# Altium PCB TK511_Blindkort.PcbDoc
Units mm, origin at the board's own origin, x right, y up, seen from the top; angles counter-clockwise.
Board outline 77.5 x 82.75 mm, 4 copper layers (TopLayer, InternalPlane1, InternalPlane2, BottomLayer); 7 components, 32 nets, 387 pads, 0 vias.
Unrouted connection lines stored in the file: 3.
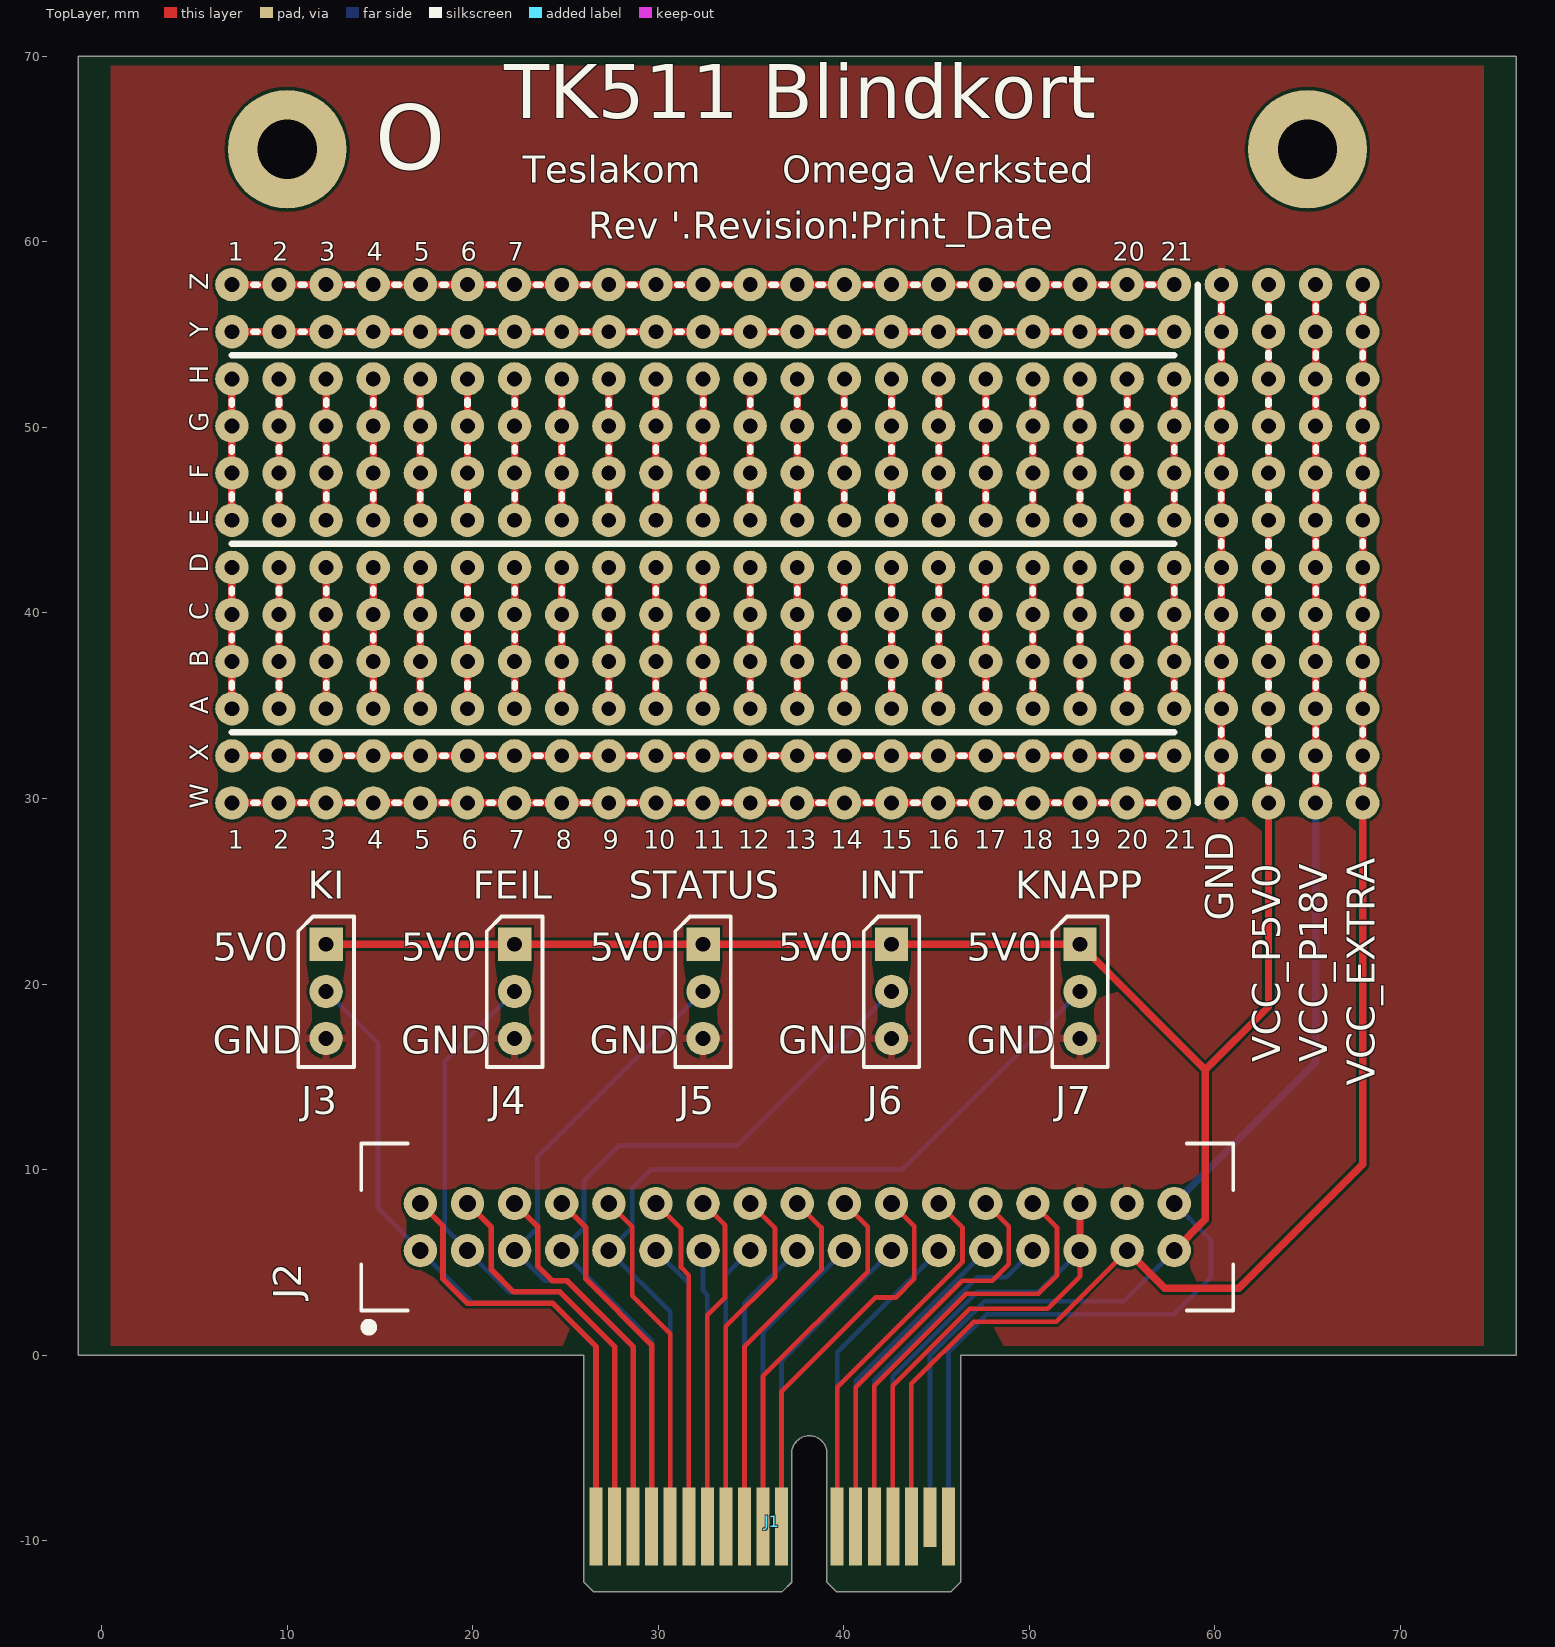
[diagram p0: TopLayer view]
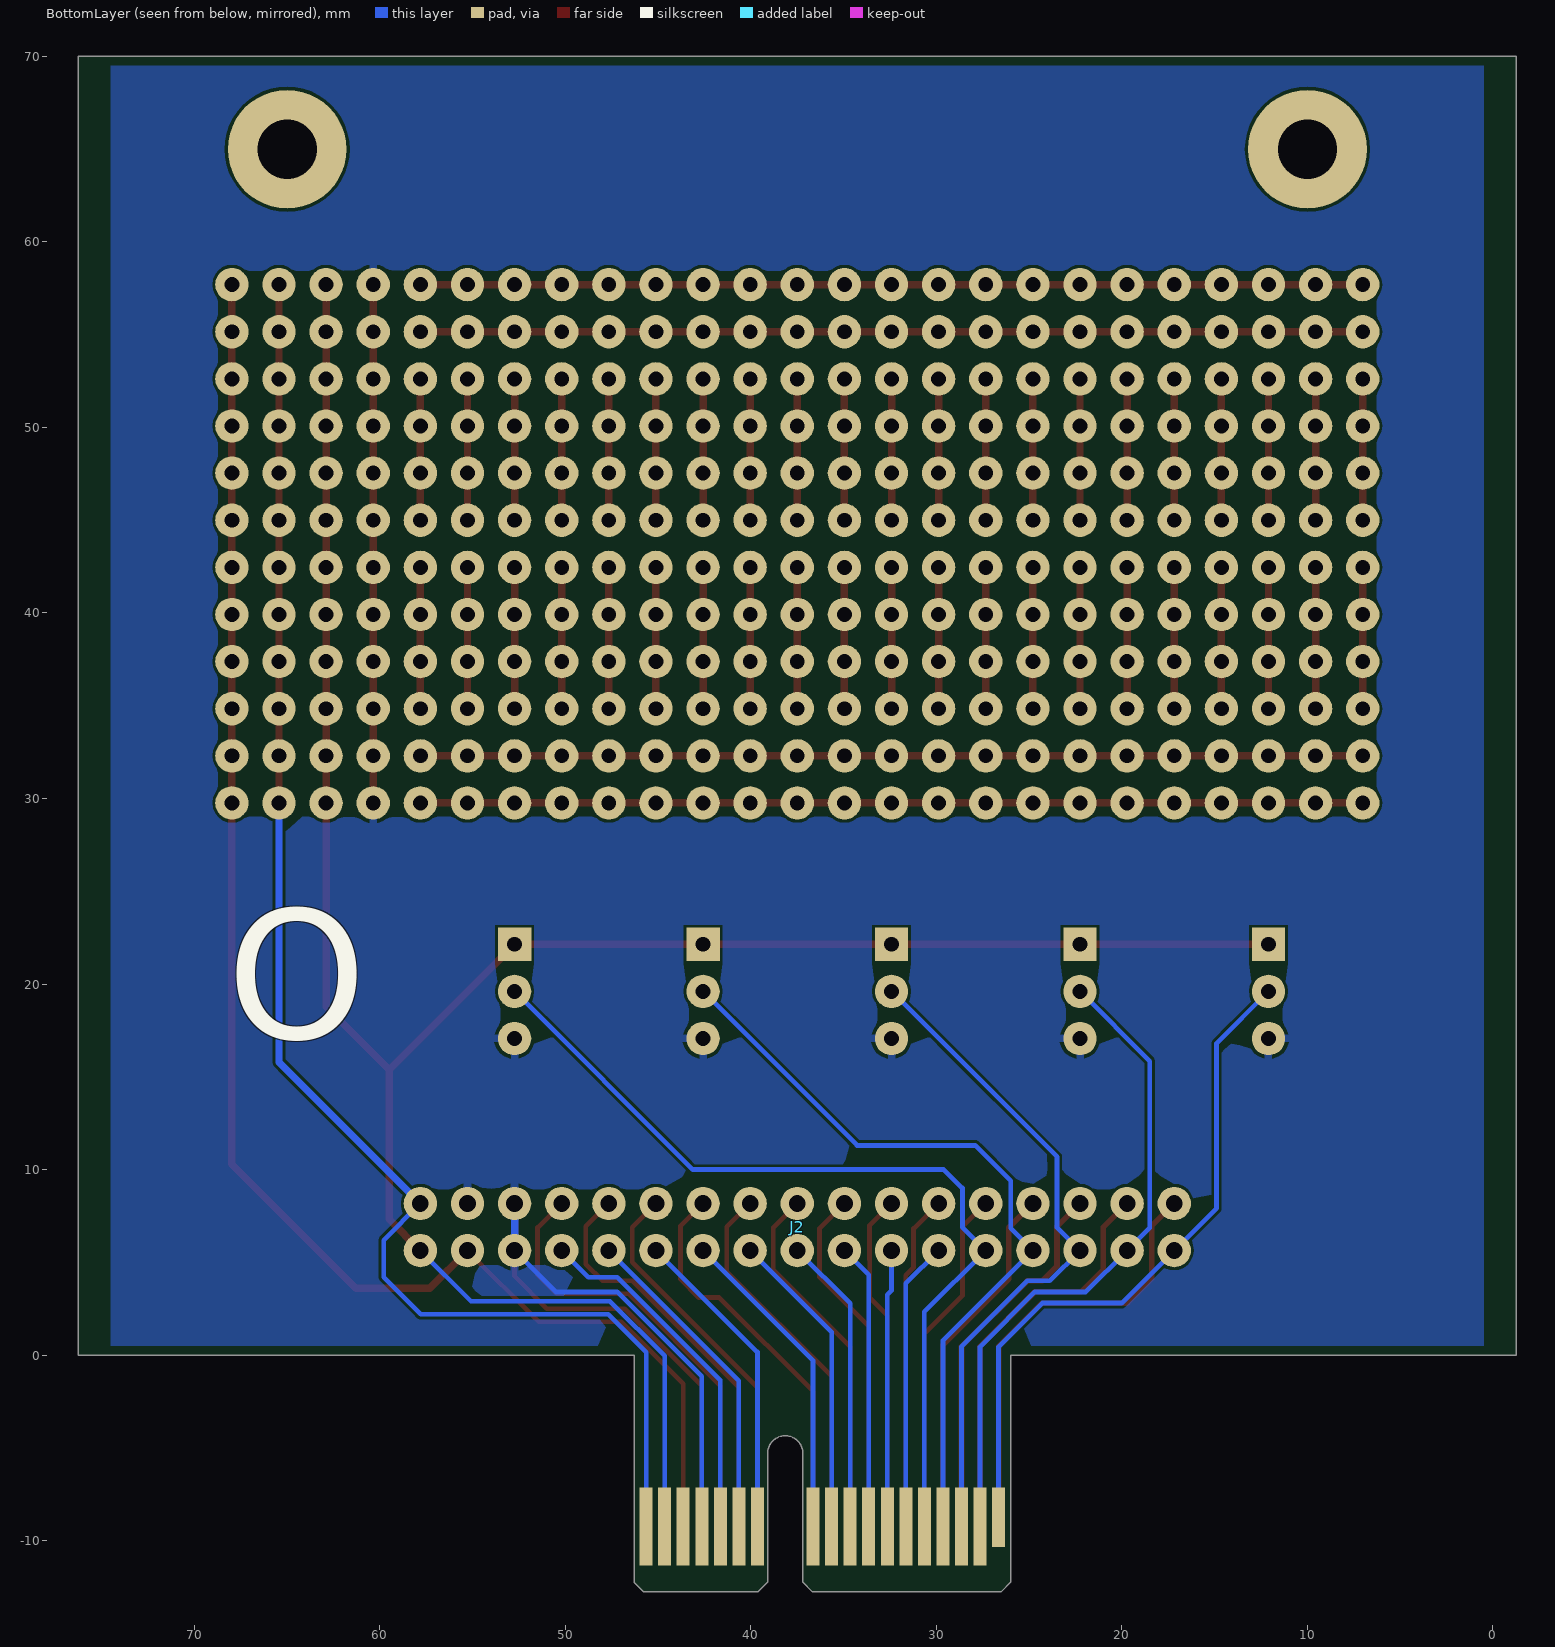
[diagram p1: BottomLayer view, seen from below]
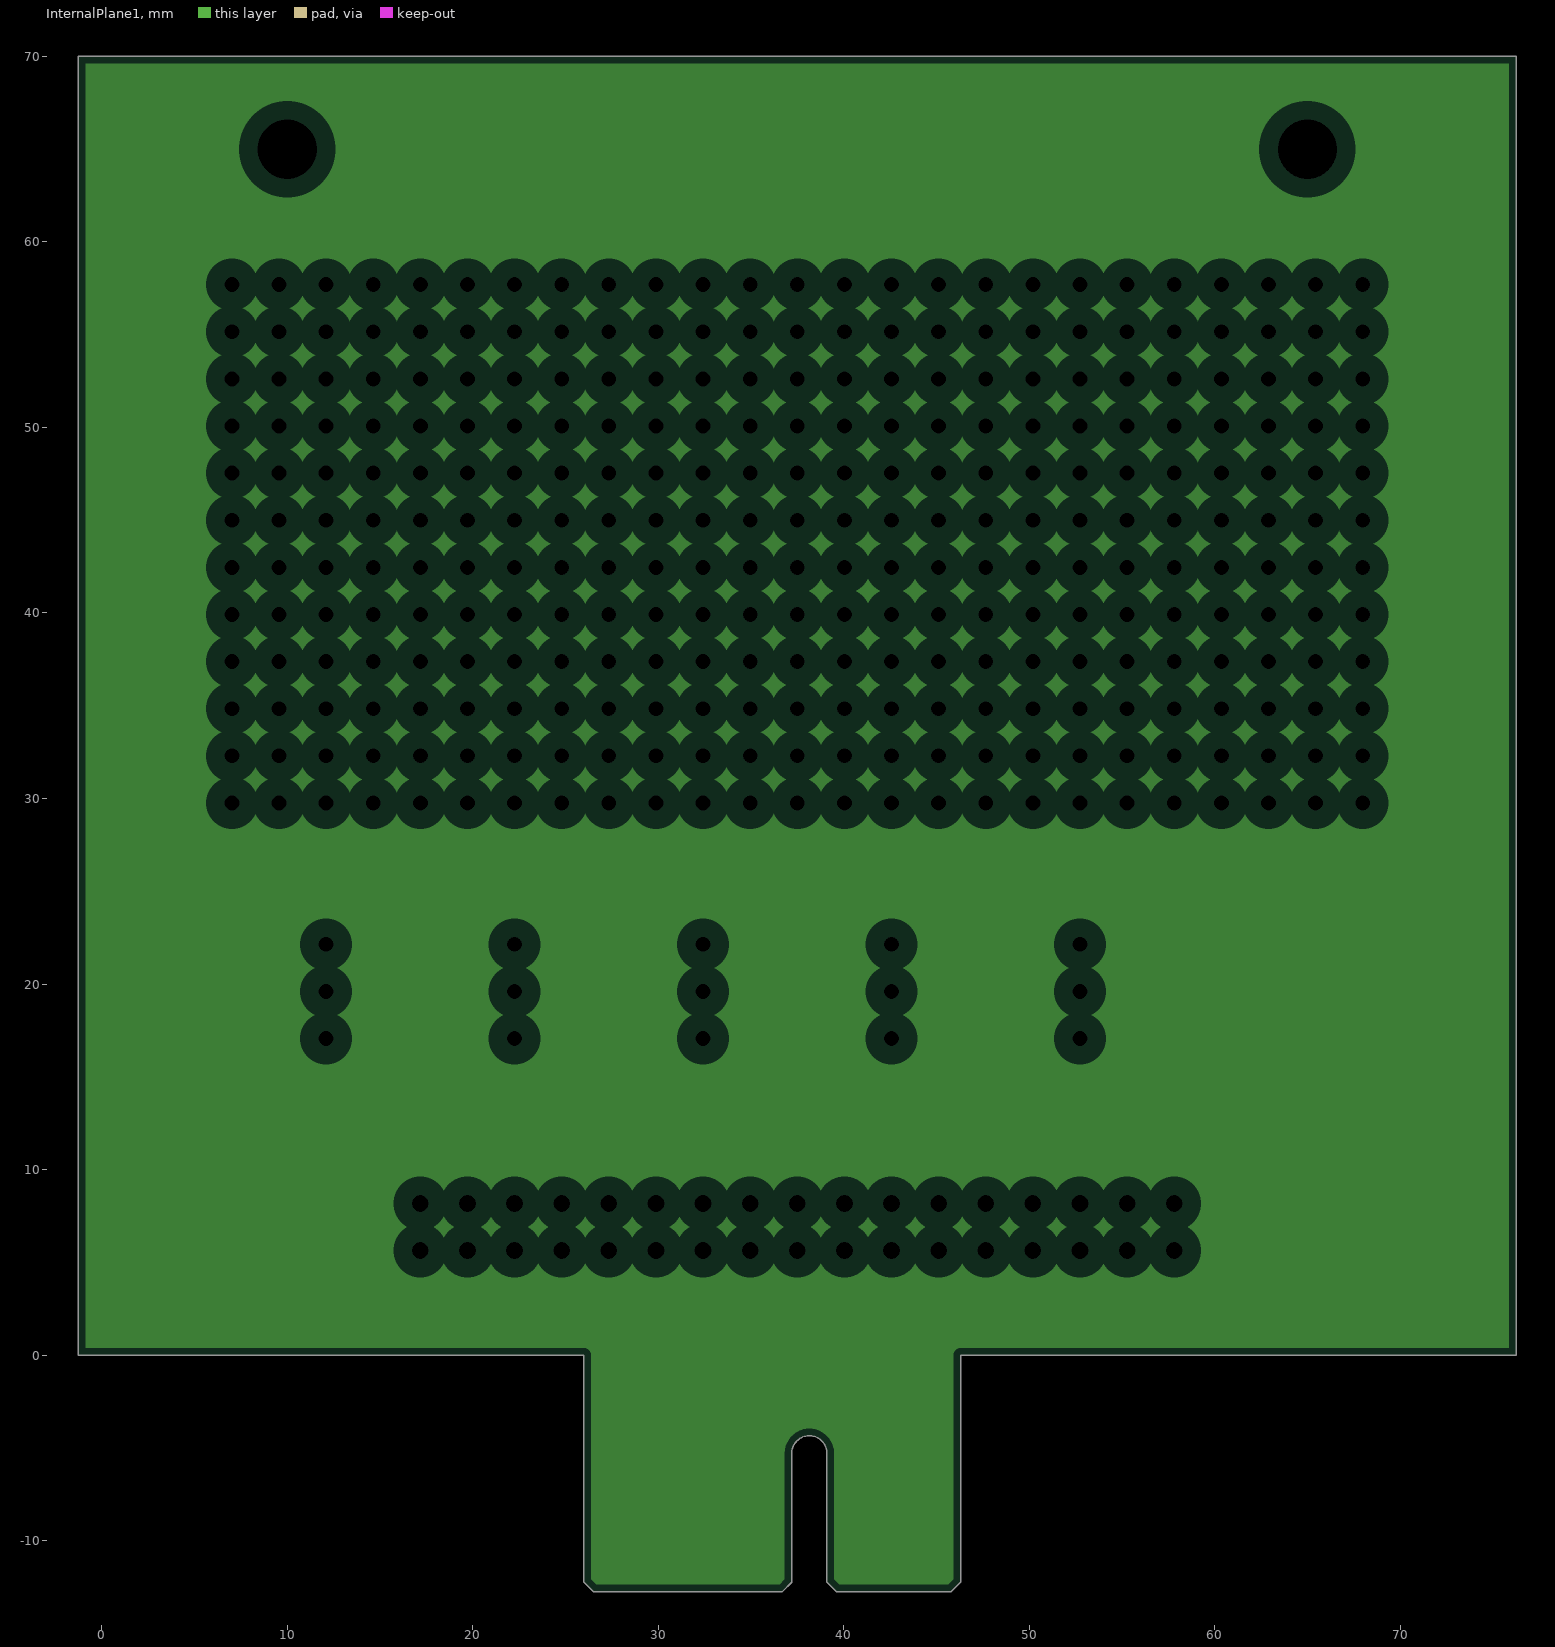
[diagram p2: InternalPlane1, clearances drawn from the general rule]
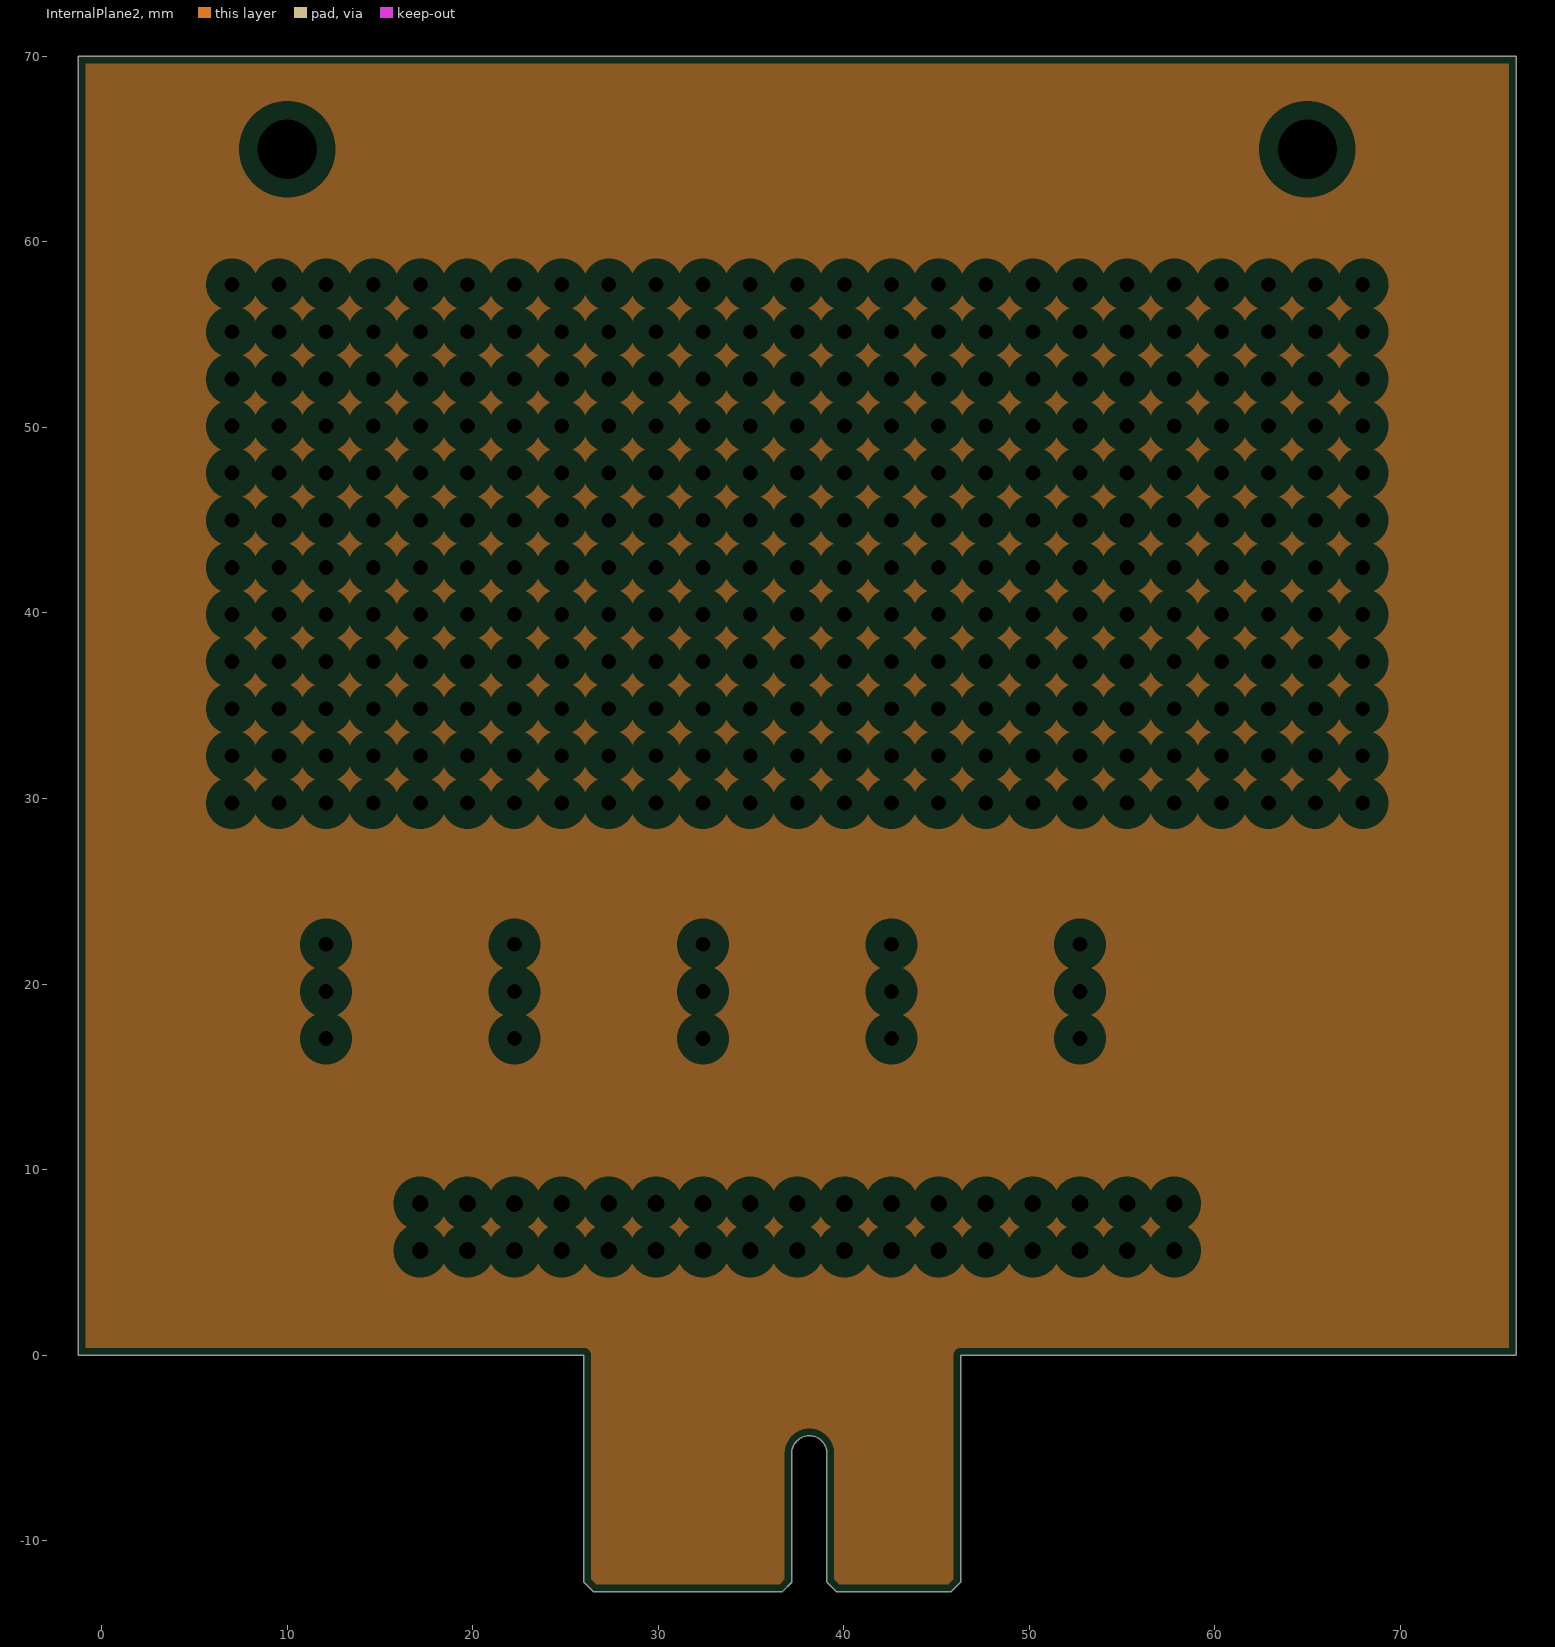
[diagram p3: InternalPlane2, clearances drawn from the general rule]

## Layer stack, top to bottom
TopSolder: solder mask 0.0102, Solder Resist, Dk 3.5
TopLayer: signal copper 0.0178
Dielectric1: core 0.32, FR-4, Dk 4.8
InternalPlane1: plane copper 0.0356
Dielectric2: prepreg 0.32, FR-4, Dk 4.8
InternalPlane2: plane copper 0.0356
Dielectric3: core 0.32, FR-4, Dk 4.8
BottomLayer: signal copper 0.0178
BottomSolder: solder mask 0.0102, Solder Resist, Dk 3.5

## Board outline
-1.25,0 14.35,0 26,0 26,-12.25 26.5,-12.75 36.7,-12.75 37.2,-12.25 37.2,-5.3 cw(c38.15,-5.3) 39.1,-5.3 39.1,-12.25 39.6,-12.75 45.8,-12.75 46.3,-12.25 46.3,0 76.25,0 76.25,70 -1.25,70

## Design rules (kind name [scope] priority, off if disabled: settings)
Clearance [All] p1: gap=0.16 ignorepadtopadclearanceinfootprint=FALSE except(0: Arc-Text Arc-Hole Track-Text Track-Hole SMDPad-Text SMDPad-Hole THPad-Text THPad-Hole Via-Text Via-Hole Fill-Text Fill-Hole Poly-Text Poly-Hole Region-Text Region-Hole Text-Text Text-Hole)
Height [All] p1: minheight=0 maxheight=200 prefheight=12.7
HoleSize [All] p1: absolutevalues=TRUE maxlimit=6.35 minlimit=0.3 maxpercent=80.000 minpercent=20.000
MinimumSolderMaskSliver [All] p1: minsoldermaskwidth=0.1
PlaneClearance [All] p1: clearance=1
PlaneConnect [All] p1: planeconnectstyle=Relief reliefexpansion=0.508 reliefentries=4 reliefconductorwidth=1 reliefairgap=0.254
PolygonConnect [All] p1: connectstyle=Relief reliefconductorwidth=0.4 reliefentries=4 polygonreliefangle="90 Angle" airgapwidth=0.2
RoomDefinition "No components" [All] p1: confinementstyle=ConfineOut formatcopy=TRUE lockcomponents=FALSE outline 0,70 0,0 5,0 5,60 15,60 15,70 0,70
RoomDefinition "No components_1" [All] p2: confinementstyle=ConfineOut formatcopy=TRUE lockcomponents=FALSE outline 75,0 70,0 70,60 60,60 60,70 75,70 75,0
RoomDefinition "No components_2" [All] p3: confinementstyle=ConfineOut formatcopy=TRUE lockcomponents=FALSE outline 46.3,0 26,0 26,-7 46.3,-7
RoutingVias [All] p1: holewidth=0.711 width=1.27 viastyle="Through Hole" minholewidth=0.711 minwidth=1.27 maxholewidth=0.711 maxwidth=1.27
SilkToSolderMaskClearance [IsPad] p1: minsilkscreentomaskgap=0.178 clearancetoexposedcopper=TRUE
SolderMaskExpansion [All] p1: expansion=0.102 istentingtop=FALSE
Width [All] p1: maxlimit=10 minlimit=0.16 preferedwidth=0.4
24 further rules are at their usual default settings.

## Components (designator, comment, footprint, x,y, rotation, side; value= is the part's Value field where it differs from the comment)
J1 "PCI_Express-36P" PCIeX1-GF-2D-1000-1K-O36 36.15,-9.25 r0 top
J2 "2X17PConnector" HDRV34W64P254_2X17_5070X900X900B 37.5,6.9 r90 bottom
J3 "Header1x3" HDRV3W64P254_1X3_762X254X900B 12.1,19.6 r0 top
J4 "Header1x3" HDRV3W64P254_1X3_762X254X900B 22.26,19.6 r0 top
J5 "Header1x3" HDRV3W64P254_1X3_762X254X900B 32.42,19.6 r0 top
J6 "Header1x3" HDRV3W64P254_1X3_762X254X900B 42.58,19.6 r0 top
J7 "Header1x3" HDRV3W64P254_1X3_762X254X900B 52.74,19.6 r0 top

## Footprints (in the part's own frame and the unit in brackets; to place one, negate y for a bottom-side part, rotate by r counter-clockwise, add the part's x,y. Pads: shape width x height; smd on the part's side, far side on the other; paste and mask are expansions set on the pad)
HDRV3W64P254_1X3_762X254X900B [mm] "Header 1x3"
  rect 1.8x1.8 hole 0.8: 1(0,2.54)
  round 1.8 hole 0.8: 2(0,0) 3(0,-2.54)
  silkscreen extent -1.5,-4.07 1.5,4.04
HDRV34W64P254_2X17_5070X900X900B [mm] "IDE-connector"
  round 1.8 hole 0.9: 1(-1.27,-20.32) 2(1.27,-20.32) 3(-1.27,-17.78) 4(1.27,-17.78) 5(-1.27,-15.24) 6(1.27,-15.24) 7(-1.27,-12.7) 8(1.27,-12.7) 9(-1.27,-10.16) 10(1.27,-10.16) 11(-1.27,-7.62) 12(1.27,-7.62) 13(-1.27,-5.08) 14(1.27,-5.08) 15(-1.27,-2.54) 16(1.27,-2.54) 17(-1.27,0) 18(1.27,0) 19(-1.27,2.54) 20(1.27,2.54) 21(-1.27,5.08) 22(1.27,5.08) 23(-1.27,7.62) 24(1.27,7.62) 25(-1.27,10.16) 26(1.27,10.16) 27(-1.27,12.7) 28(1.27,12.7) 29(-1.27,15.24) 30(1.27,15.24) 31(-1.27,17.78) 32(1.27,17.78) 33(-1.27,20.32) 34(1.27,20.32)
  body extent -4.87,-22.95 4.88,22.95, height 10.45
PCIeX1-GF-2D-1000-1K-O36 [mm] "Golden finger, PCIeX1, Dual, Opposite, Pitch 1mm, 36-Position"
  rect 0.7x3.2 smd far side paste-1: A1(-9.5,0.5)
  rect 0.7x4.2 smd far side paste-1: A2(-8.5,0) A3(-7.5,0) A4(-6.5,0) A5(-5.5,0) A6(-4.5,0) A7(-3.5,0) A8(-2.5,0) A9(-1.5,0) A10(-0.5,0) A11(0.5,0) A12(3.5,0) A13(4.5,0) A14(5.5,0) A15(6.5,0) A16(7.5,0) A17(8.5,0) A18(9.5,0)
  rect 0.7x4.2 smd paste-1: B1(-9.5,0) B2(-8.5,0) B3(-7.5,0) B4(-6.5,0) B5(-5.5,0) B6(-4.5,0) B7(-3.5,0) B8(-2.5,0) B9(-1.5,0) B10(-0.5,0) B11(0.5,0) B12(3.5,0) B13(4.5,0) B14(5.5,0) B15(6.5,0) B16(7.5,0) B18(9.5,0)
  rect 0.7x3.2 smd paste-1: B17(8.5,0.5)

## Part data
J1: library part 3037, "PCI express PCB kortkankonnektor", id=3037, komponenttype=11, navn=PCIeX1-GF-2D-1000-1K-O36, pakke_opprettet="07/06/2015 17:49:10", pakke_opprettet_av=815, pakketype=-, pris=0, produsent="PCB feature", symbol_opprettet="06/07/2014 17:26:37", symbol_opprettet_av=815
J2: library part 3259, "Header", id=3259, komponenttype=11, leverandor=Farnell, leverandor_varenr=2215313, navn="Header 2X17 Shrouded", nokkelord=IDE, pakke_opprettet="12/07/2014 17:05:20", pakke_opprettet_av=815, pakketype=TH, pris=10, produsent=Amphenol, symbol_opprettet="12/07/2014 17:03:56", symbol_opprettet_av=815
J3 J4 J5 J6 J7: library part 5095, "2,54mm pitch", id=5095, komponenttype=11, leverandor=Farnell, leverandor_varenr=3690124, navn="Header 1x3", pakke_opprettet="13/11/2014 12:31:03", pakke_opprettet_av=815, pakketype=TH, pris=2, produsent=SAMTEC, symbol_opprettet="13/11/2014 10:59:05", symbol_opprettet_av=815

## Free pads (board coordinates)
  round 6.4 hole 3.2 unplated: 0(10,65) 0(65,65)
  round 1.8 hole 0.8: 1(7.02,34.84) 1(7.02,37.38) 1(7.02,39.92) 1(7.02,42.46) 1(7.02,45) 1(7.02,47.54) 1(7.02,50.08) 1(7.02,52.62) 2(9.56,34.84) 2(9.56,37.38) 2(9.56,39.92) 2(9.56,42.46) 2(9.56,45) 2(9.56,47.54) 2(9.56,50.08) 2(9.56,52.62) 3(12.1,34.84) 3(12.1,37.38) 3(12.1,39.92) 3(12.1,42.46) 3(12.1,45) 3(12.1,47.54) 3(12.1,50.08) 3(12.1,52.62) 4(14.64,34.84) 4(14.64,37.38) 4(14.64,39.92) 4(14.64,42.46) 4(14.64,45) 4(14.64,47.54) 4(14.64,50.08) 4(14.64,52.62) 5(17.18,34.84) 5(17.18,37.38) 5(17.18,39.92) 5(17.18,42.46) 5(17.18,45) 5(17.18,47.54) 5(17.18,50.08) 5(17.18,52.62) 6(19.72,34.84) 6(19.72,37.38) 6(19.72,39.92) 6(19.72,42.46) 6(19.72,45) 6(19.72,47.54) 6(19.72,50.08) 6(19.72,52.62) 7(22.26,34.84) 7(22.26,37.38) 7(22.26,39.92) 7(22.26,42.46) 7(22.26,45) 7(22.26,47.54) 7(22.26,50.08) 7(22.26,52.62) 8(24.8,34.84) 8(24.8,37.38) 8(24.8,39.92) 8(24.8,42.46) 8(24.8,45) 8(24.8,47.54) 8(24.8,50.08) 8(24.8,52.62) 9(27.34,34.84) 9(27.34,37.38) 9(27.34,39.92) 9(27.34,42.46) 9(27.34,45) 9(27.34,47.54) 9(27.34,50.08) 9(27.34,52.62) 10(29.88,34.84) 10(29.88,37.38) 10(29.88,39.92) 10(29.88,42.46) 10(29.88,45) 10(29.88,47.54) 10(29.88,50.08) 10(29.88,52.62) 11(32.42,34.84) 11(32.42,37.38) 11(32.42,39.92) 11(32.42,42.46) 11(32.42,45) 11(32.42,47.54) 11(32.42,50.08) 11(32.42,52.62) 12(34.96,34.84) 12(34.96,37.38) 12(34.96,39.92) 12(34.96,42.46) 12(34.96,45) 12(34.96,47.54) 12(34.96,50.08) 12(34.96,52.62) 13(37.5,34.84) 13(37.5,37.38) 13(37.5,39.92) 13(37.5,42.46) 13(37.5,45) 13(37.5,47.54) 13(37.5,50.08) 13(37.5,52.62) 14(40.04,34.84) 14(40.04,37.38) 14(40.04,39.92) 14(40.04,42.46) 14(40.04,45) 14(40.04,47.54) 14(40.04,50.08) 14(40.04,52.62) 15(42.58,34.84) 15(42.58,37.38) 15(42.58,39.92) 15(42.58,42.46) 15(42.58,45) 15(42.58,47.54) 15(42.58,50.08) 15(42.58,52.62) 16(45.12,34.84) 16(45.12,37.38) 16(45.12,39.92) 16(45.12,42.46) 16(45.12,45) 16(45.12,47.54) 16(45.12,50.08) 16(45.12,52.62) 17(47.66,34.84) 17(47.66,37.38) 17(47.66,39.92) 17(47.66,42.46) 17(47.66,45) 17(47.66,47.54) 17(47.66,50.08) 17(47.66,52.62) 18(50.2,34.84) 18(50.2,37.38) 18(50.2,39.92) 18(50.2,42.46) 18(50.2,45) 18(50.2,47.54) 18(50.2,50.08) 18(50.2,52.62) 19(52.74,34.84) 19(52.74,37.38) 19(52.74,39.92) 19(52.74,42.46) 19(52.74,45) 19(52.74,47.54) 19(52.74,50.08) 19(52.74,52.62) 20(55.28,34.84) 20(55.28,37.38) 20(55.28,39.92) 20(55.28,42.46) 20(55.28,45) 20(55.28,47.54) 20(55.28,50.08) 20(55.28,52.62) 21(57.82,34.84) 21(57.82,37.38) 21(57.82,42.46) 21(57.82,45) 21(57.82,47.54) 21(57.82,50.08) 21(57.82,52.62) 22(7.02,29.76) 22(9.56,29.76) 22(12.1,29.76) 22(14.64,29.76) 22(17.18,29.76) 22(19.72,29.76) 22(22.26,29.76) 22(24.8,29.76) 22(27.34,29.76) 22(29.88,29.76) 22(32.42,29.76) 22(34.96,29.76) 22(37.5,29.76) 22(40.04,29.76) 22(42.58,29.76) 22(45.12,29.76) 22(47.66,29.76) 22(50.2,29.76) 22(52.74,29.76) 22(55.28,29.76) 22(57.82,29.76) 23(7.02,32.3) 23(9.56,32.3) 23(12.1,32.3) 23(14.64,32.3) 23(17.18,32.3) 23(19.72,32.3) 23(22.26,32.3) 23(24.8,32.3) 23(27.34,32.3) 23(29.88,32.3) 23(32.42,32.3) 23(34.96,32.3) 23(37.5,32.3) 23(40.04,32.3) 23(42.58,32.3) 23(45.12,32.3) 23(47.66,32.3) 23(50.2,32.3) 23(52.74,32.3) 23(55.28,32.3) 23(57.82,32.3) 24(7.02,55.16) 24(9.56,55.16) 24(12.1,55.16) 24(14.64,55.16) 24(17.18,55.16) 24(19.72,55.16) 24(22.26,55.16) 24(24.8,55.16) 24(27.34,55.16) 24(29.88,55.16) 24(32.42,55.16) 24(34.96,55.16) 24(37.5,55.16) 24(40.04,55.16) 24(42.58,55.16) 24(45.12,55.16) 24(47.66,55.16) 24(50.2,55.16) 24(52.74,55.16) 24(55.28,55.16) 24(57.82,39.92) 24(57.82,55.16) 25(7.02,57.7) 25(9.56,57.7) 25(12.1,57.7) 25(14.64,57.7) 25(17.18,57.7) 25(19.72,57.7) 25(22.26,57.7) 25(24.8,57.7) 25(27.34,57.7) 25(29.88,57.7) 25(32.42,57.7) 25(34.96,57.7) 25(37.5,57.7) 25(40.04,57.7) 25(42.58,57.7) 25(45.12,57.7) 25(47.66,57.7) 25(50.2,57.7) 25(52.74,57.7) 25(55.28,57.7) 25(57.82,57.7) 26(60.36,29.76) 26(60.36,32.3) 26(60.36,34.84) 26(60.36,37.38) 26(60.36,39.92) 26(60.36,42.46) 26(60.36,45) 26(60.36,47.54) 26(60.36,50.08) 26(60.36,52.62) 26(60.36,55.16) 26(60.36,57.7) 27(62.9,29.76) 27(62.9,32.3) 27(62.9,34.84) 27(62.9,37.38) 27(62.9,39.92) 27(62.9,42.46) 27(62.9,45) 27(62.9,47.54) 27(62.9,50.08) 27(62.9,52.62) 27(62.9,55.16) 27(62.9,57.7) 28(65.44,29.76) 28(65.44,32.3) 28(65.44,34.84) 28(65.44,37.38) 28(65.44,39.92) 28(65.44,42.46) 28(65.44,45) 28(65.44,47.54) 28(65.44,50.08) 28(65.44,52.62) 28(65.44,55.16) 28(65.44,57.7) 29(67.98,29.76) 29(67.98,32.3) 29(67.98,34.84) 29(67.98,37.38) 29(67.98,39.92) 29(67.98,42.46) 29(67.98,45) 29(67.98,47.54) 29(67.98,50.08) 29(67.98,52.62) 29(67.98,55.16) 29(67.98,57.7)

## Nets (pads, with @x,y where several pads share a name; then routed paths per layer and width w, separated by ;. In a path a pad name is that pad's centre, name@x,y a point inside that pad or via, vN(x,y) a via of type N, cw(c..) or ccw(c..) an arc to the next point about the centre after c; other vN are vias at no path point)
AUX1_A: J1.A11 J2.21 | length 17.3
  BottomLayer w0.254: J1.A11 36.65,-0.3 J2.21
AUX1_B: J1.A12 J2.23 | length 17.1
  BottomLayer w0.254: J1.A12 39.65,0.16 J2.23
AUX2_A: J1.A13 J2.25 | length 17.8
  BottomLayer w0.254: J1.A13 40.65,-1.38 J2.25
AUX2_B: J1.A14 J2.27 | length 19.3
  BottomLayer w0.254: J1.A14 41.65,-1.35 47.2,4.2 48.77,4.2 J2.27
B5: J1.B5 J2.10 | length 18.8
  TopLayer w0.254: J2.10 28.6,6.91 28.6,3.2 30.65,1.15 J1.B5
B6: J1.B6 J2.12 | length 18.2
  TopLayer w0.254: J2.12 31.233,6.817 31.233,4.721 31.65,4.304 J1.B6
B7: J1.B7 J2.14 | length 18.3
  TopLayer w0.254: J2.14 33.607,6.983 33.607,5.131 33.6,5.124 33.6,3.1 32.65,2.15 J1.B7
B8: J1.B8 J2.16 | length 19.1
  TopLayer w0.254: J1.B8 33.65,1.55 36.3,4.2 36.3,6.83 J2.16
B9: J1.B9 J2.18 | length 19.7
  TopLayer w0.254: J1.B9 34.65,0.45 38.8,4.6 38.8,6.87 J2.18
B10: J1.B10 J2.20 | length 20.3
  TopLayer w0.254: J1.B10 35.65,-1.15 41.3,4.5 41.3,6.91 J2.20
B11: J1.B11 J2.22 | length 21.5
  TopLayer w0.254: J1.B11 36.65,-1.95 41.7,3.1 42.8,3.1 43.8,4.1 43.8,6.95 J2.22
B12: J1.B12 J2.24 | length 20.7
  TopLayer w0.254: J1.B12 39.65,-1.75 46.4,5 46.4,6.89 J2.24
B13: J1.B13 J2.26 | length 22.3
  TopLayer w0.254: J1.B13 40.65,-1.75 46.4,4 48,4 48.9,4.9 48.9,6.93 J2.26
B14: J1.B14 J2.28 | length 24.3
  TopLayer w0.254: J1.B14 41.65,-1.65 46.6,3.3 50.5,3.3 51.5,4.3 51.5,6.87 J2.28
FEIL: J1.A2 J2.3 J4.2 | length 35.8
  BottomLayer w0.254: J4.2 18.5,15.84 18.5,6.85 J2.3 21.95,3.4 24.7,3.4 27.65,0.45 J1.A2
FP_1: J1.A6 J2.11 | length 15.6
  BottomLayer w0.254: J2.11 31.65,3.86 J1.A6
FP_2: J1.A7 J2.13 | length 15
  BottomLayer w0.254: J2.13 32.42,3.48 32.65,3.25 J1.A7
FP_3: J1.A8 J2.15 | length 15.4
  BottomLayer w0.254: J1.A8 33.65,4.32 J2.15
FP_4: J1.A9 J2.17 | length 16.1
  BottomLayer w0.254: J1.A9 34.65,2.78 J2.17
FP_5: J1.A10 J2.19 | length 16.7
  BottomLayer w0.254: J1.A10 35.65,1.24 J2.19
GND: J1.A15 J1.B15 J2.29 J2.30 J2.32 J3.3 J4.3 J5.3 J6.3 J7.3 pad.26 | length 75.5
  TopLayer w0.254: J1.B15 42.65,-1.65 46.8,2.5 51,2.5 52.74,4.24 J2.29
  TopLayer w0.4: J2.29 J2.30 ; pad.26@60.36,29.76 60.36,32.3 60.36,34.84 60.36,37.38 60.36,39.92 60.36,42.46 60.36,45 60.36,47.54 60.36,50.08 60.36,52.62 60.36,55.16 pad.26@60.36,57.7
  BottomLayer w0.254: J1.A15 42.65,-1.15 47.2,3.4 50.51,3.4 J2.29
  BottomLayer w0.4: J2.29 J2.30
INTERRUPT: J1.A4 J2.7 J6.2 | length 42
  BottomLayer w0.254: J1.A4 29.65,0.78 J2.7 26,6.83 26,9.4 27.9,11.3 34.28,11.3 J6.2
INTERRUPT_BUS: J1.B4 J2.8 | length 19.4
  TopLayer w0.3: J2.8 26.1,6.87 26.1,4.1 29.65,0.55 J1.B4
KNAPP: J1.A5 J2.9 J7.2 | length 48.7
  BottomLayer w0.254: J1.A5 30.65,2.32 J2.9 28.6,6.89 28.6,9 29.6,10 43.14,10 J7.2
KORT_INNSATT: J1.A1 J2.1 J3.2 | length 36.9
  BottomLayer w0.254: J3.2 14.9,16.8 14.9,7.91 J2.1 20.01,2.8 24.3,2.8 26.65,0.45 J1.A1
KORT_INNSATT_BUS: J1.B1 J2.2 | length 24
  TopLayer w0.3: J2.2 18.4,6.95 18.4,4.1 19.7,2.8 24.3,2.8 26.65,0.45 J1.B1
LIMIT_BUS: J1.B3 J2.6 | length 20.5
  TopLayer w0.3: J2.6 23.5,6.93 23.5,4.8 24.3,4 25.1,4 28.65,0.45 J1.B3
STATUS: J1.A3 J2.5 J5.2 | length 36.4
  BottomLayer w0.254: J1.A3 28.65,0.45 25.1,4 23.89,4 J2.5 23.5,6.87 23.5,10.68 J5.2
TRIGGER_BUS: J1.B2 J2.4 | length 22.2
  TopLayer w0.3: J2.4 21,6.89 21,4.6 22.2,3.4 24.7,3.4 27.65,0.45 J1.B2
VCC_EXTRA: J1.A16 J1.B16 J2.31 pad.29 | length 86
  TopLayer w0.254: J1.B16 43.65,-1.55 47,1.8 51.45,1.8 J2.31
  TopLayer w0.4: J2.31 57.31,3.6 61.3,3.6 67.98,10.28 67.98,29.76 67.98,32.3 67.98,34.84 67.98,37.38 67.98,39.92 67.98,42.46 67.98,45 67.98,47.54 67.98,50.08 67.98,52.62 67.98,55.16 pad.29@67.98,57.7
VCC_P5V0: J1.A17 J1.B17 J2.33 J3.1 J4.1 J5.1 J6.1 J7.1 pad.27 | length 129.1
  TopLayer w0.4: J3.1 J4.1 J5.1 J6.1 J7.1 59.5,15.38 ; J2.33 59.5,7.31 59.5,15.38 ; pad.27@62.9,57.7 62.9,55.16 62.9,52.62 62.9,50.08 62.9,47.54 62.9,45 62.9,42.46 62.9,39.92 62.9,37.38 62.9,34.84 62.9,32.3 62.9,29.76 62.9,18.78 59.5,15.38
  BottomLayer w0.254: J1.A17 44.65,-0.05 47.6,2.9 55.09,2.9 J2.33
VCC_P18V: J1.A18 J1.B18 J2.34 pad.28 | length 82.7
  TopLayer w0.4: pad.28@65.44,29.76 65.44,32.3 65.44,34.84 65.44,37.38 65.44,39.92 65.44,42.46 65.44,45 65.44,47.54 65.44,50.08 65.44,52.62 65.44,55.16 pad.28@65.44,57.7
  BottomLayer w0.254: J1.A18 45.65,0.15 47.7,2.2 57.8,2.2 59.8,4.2 59.8,6.19 J2.34
  BottomLayer w0.4: J2.34 65.44,15.79 pad.28@65.44,29.76
copper on no net: | length 523.2
  TopLayer w0.4: 7.02,29.76 57.82,29.76 ; 7.02,32.3 57.82,32.3 ; 7.02,34.84 7.02,42.46 ; 7.02,45 7.02,52.62 ; 7.02,55.16 57.82,55.16 ; 7.02,57.7 57.82,57.7 ; 9.56,34.84 9.56,42.46 ; 9.56,45 9.56,52.62 ; 12.1,34.84 12.1,42.46 ; 12.1,45 12.1,52.62 ; 14.64,34.84 14.64,42.46 ; 14.64,45 14.64,52.62 ; 17.18,34.84 17.18,42.46 ; 17.18,45 17.18,52.62 ; 19.72,34.84 19.72,42.46 ; 19.72,45 19.72,52.62 ; 22.26,34.84 22.26,42.46 ; 22.26,45 22.26,52.62 ; 24.8,34.84 24.8,42.46 ; 24.8,45 24.8,52.62 ; 27.34,34.84 27.34,42.46 ; 27.34,45 27.34,52.62 ; 29.88,34.84 29.88,42.46 ; 29.88,45 29.88,52.62 ; 32.42,34.84 32.42,42.46 ; 32.42,45 32.42,52.62 ; 34.96,34.84 34.96,42.46 ; 34.96,45 34.96,52.62 ; 37.5,34.84 37.5,42.46 ; 37.5,45 37.5,52.62 ; 40.04,34.84 40.04,42.46 ; 40.04,45 40.04,52.62 ; 42.58,34.84 42.58,42.46 ; 42.58,45 42.58,52.62 ; 45.12,34.84 45.12,42.46 ; 45.12,45 45.12,52.62 ; 47.66,34.84 47.66,42.46 ; 47.66,45 47.66,52.62 ; 50.2,34.84 50.2,42.46 ; 50.2,45 50.2,52.62 ; 52.74,34.84 52.74,42.46 ; 52.74,45 52.74,52.62 ; 55.28,34.84 55.28,42.46 ; 55.28,45 55.28,52.62 ; 57.82,34.84 57.82,42.46 ; 57.82,45 57.82,52.62

## Polygon pours and split planes (outlines as drawn)
GND on TopLayer "Top Layer GND" (solid, pour order 0): 0.5,69.5 74.5,69.5 74.5,0.5 0.5,0.5
GND on BottomLayer "Bottom Layer GND" (solid, pour order 2): 0.5,69.5 74.5,69.5 74.5,0.5 0.5,0.5
no net on InternalPlane2 (split plane): 75.867,0.383 46.3,0.383 46.225,0.375 46.153,0.354 46.087,0.318 46.029,0.271 45.982,0.213 45.946,0.147 45.925,0.075 45.917,0 45.917,-12.091 45.641,-12.367 39.759,-12.367 39.483,-12.091 39.483,-5.3 39.475,-5.151 39.45,-5.003 39.408,-4.86 39.351,-4.722 39.279,-4.591 39.192,-4.469 39.093,-4.357 38.981,-4.258 38.859,-4.171 38.728,-4.099 38.59,-4.042 38.447,-4 38.299,-3.975 38.15,-3.967 38.001,-3.975 37.853,-4 37.71,-4.042 37.572,-4.099 37.441,-4.171 37.319,-4.258 37.207,-4.357 37.108,-4.469 37.021,-4.591 36.949,-4.722 36.892,-4.86 36.85,-5.003 36.825,-5.151 36.817,-5.3 36.817,-12.091 36.541,-12.367 26.659,-12.367 26.383,-12.091 26.383,0 26.375,0.075 26.354,0.147 26.318,0.213 26.271,0.271 26.213,0.318 26.146,0.354 26.075,0.375 26,0.383 14.35,0.383 -0.867,0.383 -0.867,69.617 75.867,69.617
no net on InternalPlane1 (split plane): 75.867,0.383 46.3,0.383 46.225,0.375 46.153,0.354 46.087,0.318 46.029,0.271 45.982,0.213 45.946,0.147 45.925,0.075 45.917,0 45.917,-12.091 45.641,-12.367 39.759,-12.367 39.483,-12.091 39.483,-5.3 39.475,-5.151 39.45,-5.003 39.408,-4.86 39.351,-4.722 39.279,-4.591 39.192,-4.469 39.093,-4.357 38.981,-4.258 38.859,-4.171 38.728,-4.099 38.59,-4.042 38.447,-4 38.299,-3.975 38.15,-3.967 38.001,-3.975 37.853,-4 37.71,-4.042 37.572,-4.099 37.441,-4.171 37.319,-4.258 37.207,-4.357 37.108,-4.469 37.021,-4.591 36.949,-4.722 36.892,-4.86 36.85,-5.003 36.825,-5.151 36.817,-5.3 36.817,-12.091 36.541,-12.367 26.659,-12.367 26.383,-12.091 26.383,0 26.375,0.075 26.354,0.147 26.318,0.213 26.271,0.271 26.213,0.318 26.146,0.354 26.075,0.375 26,0.383 14.35,0.383 -0.867,0.383 -0.867,69.617 75.867,69.617

## Silkscreen, mask and mechanical layers (free items; w line width, h text height)
TopOverlay:
  drawing of 254 lines, arcs and shapes, not listed
  text "TK511 Blindkort" at 21.7,65.7 h5
  text "O" at 14.75,62.75 h6
  text "Teslakom" at 22.7,62.7 h2.5
  text "Omega Verksted" at 36.7,62.7 h2.5
  text "Rev '.Revision'" at 26.24,59.7 h2.5
  text ".Print_Date" at 40.24,59.7 h2.5
  text "1" at 6.8,59 h1
  text "2" at 9.2,59 h1
  text "3" at 11.74,59 h1
  text "4" at 14.28,59 h1
  text "5" at 16.82,59 h1
  text "6" at 19.36,59 h1
  text "7" at 21.9,59 h1
  text "20" at 54.5,59 h1
  text "21" at 57.1,59 h1
  text "Z" at 5.75,57.4 h1 r90
  text "Y" at 5.75,54.86 h1 r90
  text "H" at 5.75,52.32 h1 r90
  text "G" at 5.75,49.78 h1 r90
  text "F" at 5.75,47.24 h1 r90
  text "E" at 5.75,44.7 h1 r90
  text "D" at 5.75,42.16 h1 r90
  text "C" at 5.75,39.62 h1 r90
  text "B" at 5.75,37.08 h1 r90
  text "A" at 5.75,34.54 h1 r90
  text "X" at 5.75,32 h1 r90
  text "W" at 5.75,29.46 h1 r90
  text "1" at 6.8,27.3 h1
  text "2" at 9.24,27.3 h1
  text "3" at 11.78,27.3 h1
  text "4" at 14.32,27.3 h1
  text "5" at 16.86,27.3 h1
  text "6" at 19.4,27.3 h1
  text "7" at 21.94,27.3 h1
  text "8" at 24.48,27.3 h1
  text "9" at 27.02,27.3 h1
  text "10" at 29.2,27.3 h1
  text "11" at 31.9,27.3 h1
  text "12" at 34.3,27.3 h1
  text "13" at 36.8,27.3 h1
  text "14" at 39.3,27.3 h1
  text "15" at 42,27.3 h1
  text "16" at 44.5,27.3 h1
  text "17" at 47.04,27.3 h1
  text "18" at 49.58,27.3 h1
  text "19" at 52.12,27.3 h1
  text "20" at 54.68,27.3 h1
  text "21" at 57.28,27.3 h1
  text "KI" at 11.1,24.6 h1.52
  text "FEIL" at 20.01,24.6 h1.52
  text "STATUS" at 28.42,24.6 h1.52
  text "INT" at 40.83,24.6 h1.52
  text "KNAPP" at 49.24,24.6 h1.52
  text "GND" at 60.995,23.41 h1.52 r90
  text "5V0" at 6,21.25 h1.52
  text "5V0" at 16.16,21.25 h1.52
  text "5V0" at 26.32,21.25 h1.52
  text "5V0" at 36.48,21.25 h1.52
  text "5V0" at 46.64,21.25 h1.52
  text "GND" at 6,16.25 h1.52
  text "GND" at 16.16,16.25 h1.52
  text "GND" at 26.32,16.25 h1.52
  text "GND" at 36.48,16.25 h1.52
  text "GND" at 46.64,16.25 h1.52
  text "VCC_P5V0" at 63.535,15.79 h1.52 r90
  text "VCC_P18V" at 66.075,15.79 h1.52 r90
  text "VCC_EXTRA" at 68.615,14.52 h1.52 r90
BottomOverlay:
  text "O" at 68.25,14.75 h12
PCI-SIG Outline:
  lines w0.1: -1.25,0 -1.25,70 76.25,70 76.25,0 46.3,0 46.3,-12.25 45.8,-12.75 39.6,-12.75 39.1,-12.25 39.1,-5.3 ccw(c38.15,-5.3) 37.2,-5.3 37.2,-12.25 36.7,-12.75 26.5,-12.75 26,-12.25 26,0 14.35,0 -1.25,0 ; 0,70 0,70
DrillDrawing:
  text ".LEGEND" at 206.25,46.602 h1
  text "Drilling Details." at 206.25,44.773 h1